# Altium PCB Blacklight.PcbDoc
Units mm, origin at the board's own origin, x right, y up, seen from the top; angles counter-clockwise.
Board outline 140 x 100 mm, 2 copper layers (Top Layer, Bottom Layer); 49 components, 26 nets, 111 pads, 0 vias.
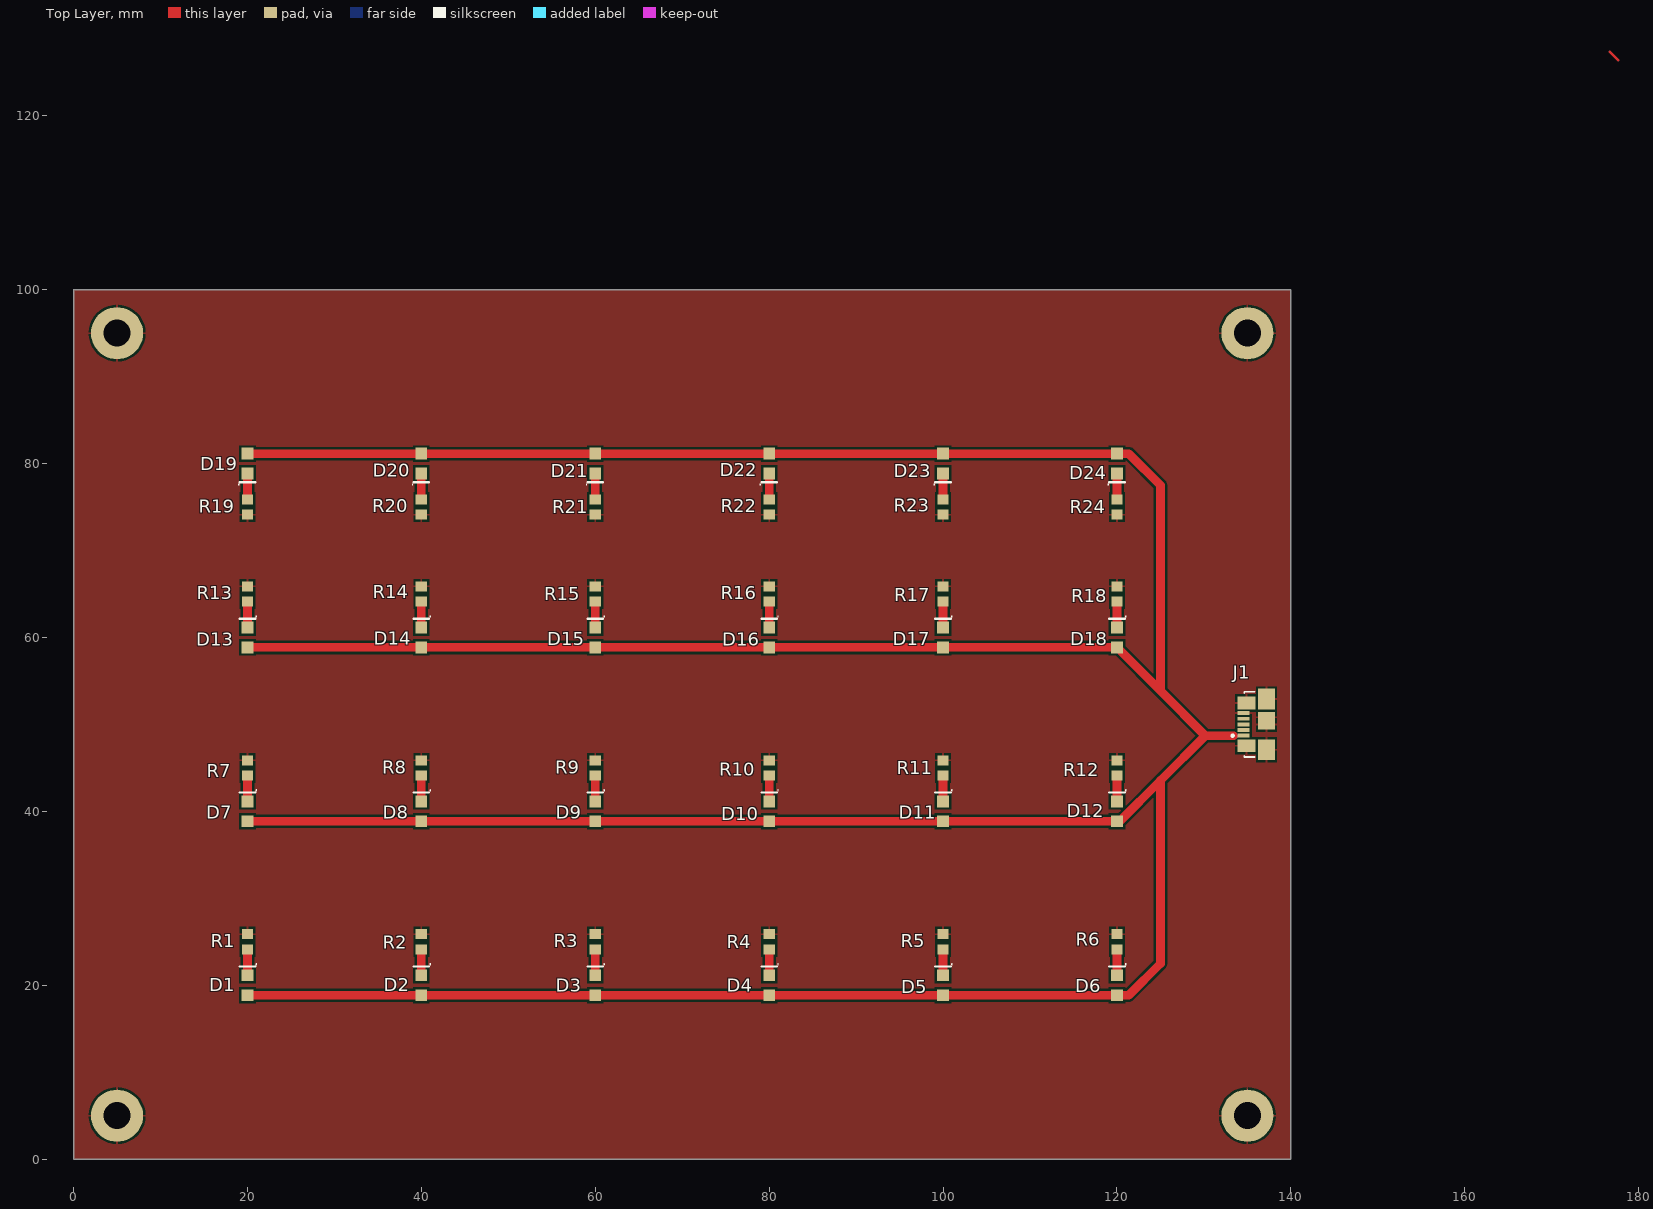
[diagram p0: Top Layer view]
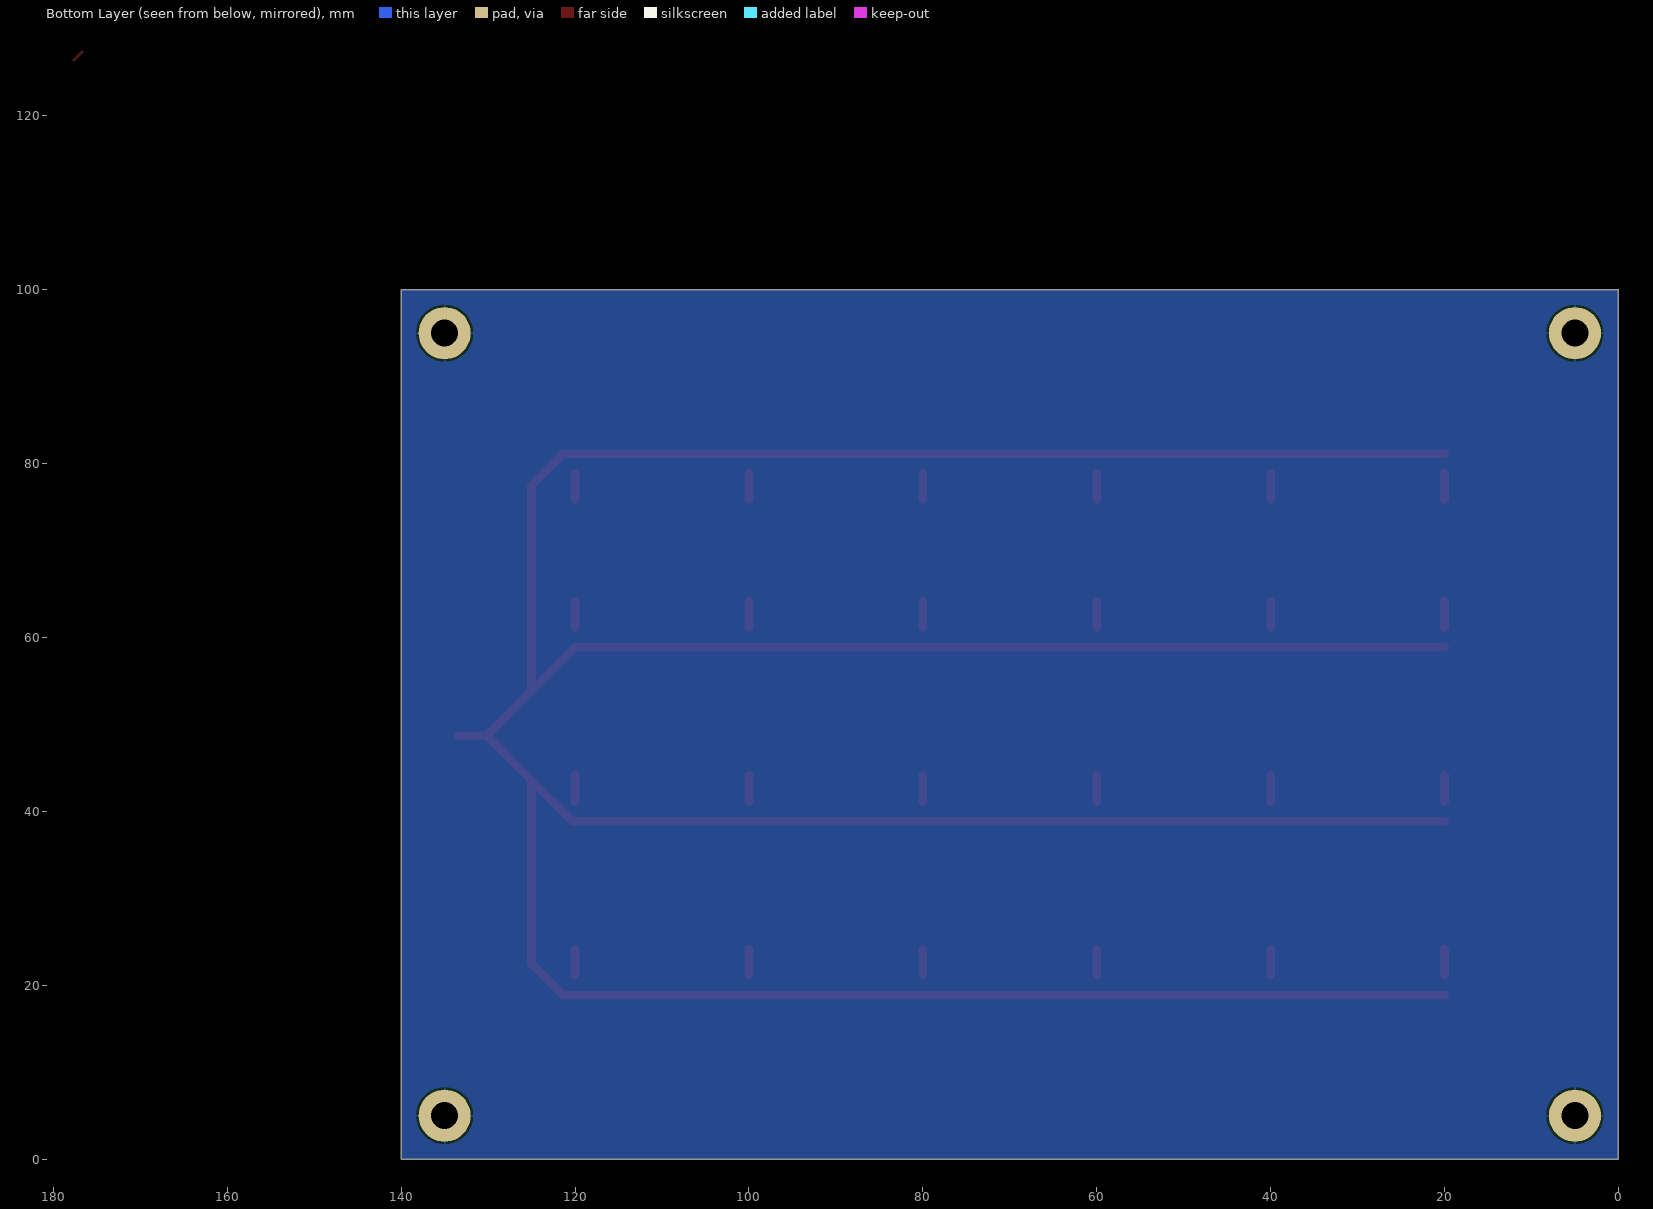
[diagram p1: Bottom Layer view, seen from below]
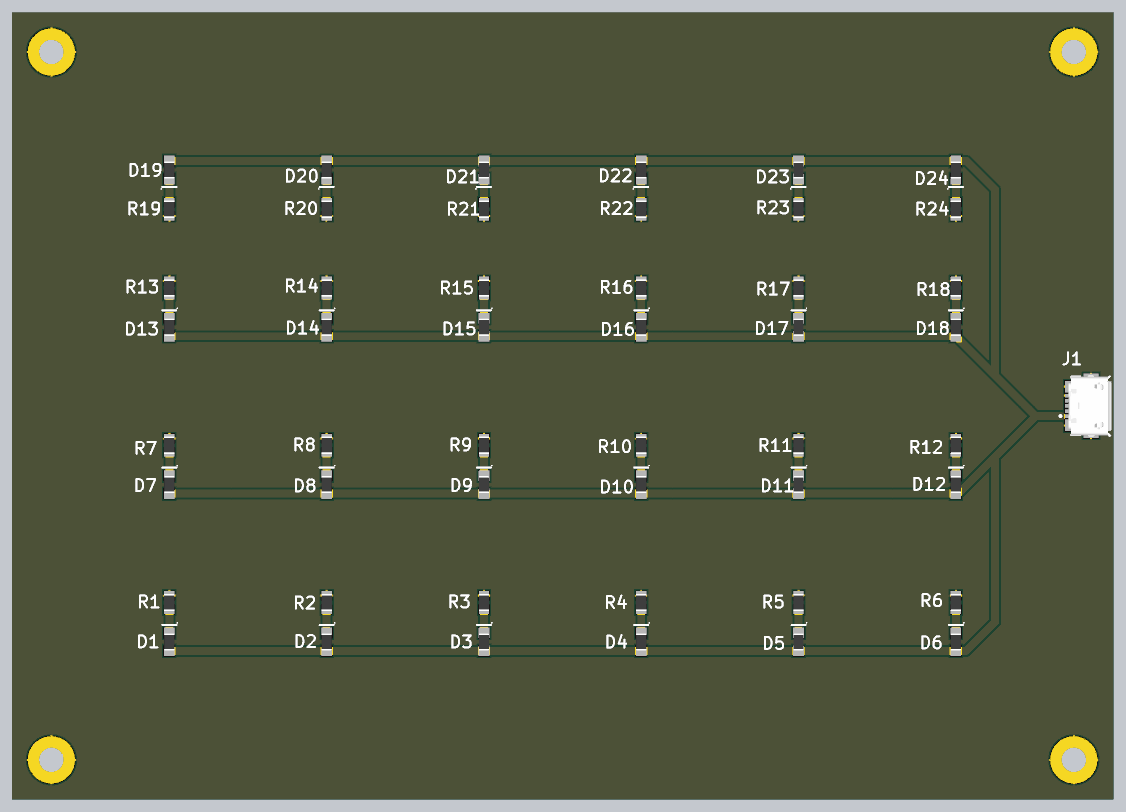
[diagram p2: 3D render of the assembled board from above, using the file's embedded part models]

## Layer stack, top to bottom
Top Solder: solder mask 0.0102, Solder Resist, Dk 3.5
Top Layer: signal copper 0.0356
Dielectric 1: dielectric 0.32, FR-4, Dk 4.8
Bottom Layer: signal copper 0.0356
Bottom Solder: solder mask 0.0102, Solder Resist, Dk 3.5

## Board outline
0,0 0,100 140,100 140,0

## Design rules (kind name [scope] priority, off if disabled: settings)
Clearance [All] p1: gap=0.254 ignorepadtopadclearanceinfootprint=FALSE except(0: Arc-Hole Track-Hole SMDPad-SMDPad SMDPad-THPad SMDPad-Via SMDPad-Hole THPad-Hole Via-Hole Fill-Hole Poly-Hole Region-Hole Text-Hole; 0.1: Arc-SMDPad Track-SMDPad)
PolygonConnect [All] p1: connectstyle=Relief reliefconductorwidth=0.254 reliefentries=4 polygonreliefangle="90 Angle" airgapwidth=0.254
RoomDefinition Backlight [InComponentClass('Backlight')] p1: confinementstyle=ConfineIn formatcopy=TRUE lockcomponents=FALSE outline 0,0 140,0 140,100 0,100
RoutingVias [All] p1: holewidth=0.711 width=1.27 viastyle="Through Hole" minholewidth=0.711 minwidth=1.27 maxholewidth=0.711 maxwidth=1.27
SolderMaskExpansion [All] p1: expansion=0.102
Width [All] p1: maxlimit=5 minlimit=0.1 preferedwidth=1
30 further rules are at their usual default settings.

## Components (designator, comment, footprint, x,y, rotation, side; value= is the part's Value field where it differs from the comment)
D1 "LED0" DIOC2012X06N 20,20 r90 top
D2 "LED0" DIOC2012X06N 40,20 r90 top
D3 "LED0" DIOC2012X06N 60,20 r90 top
D4 "LED0" DIOC2012X06N 80,20 r90 top
D5 "LED0" DIOC2012X06N 100,20 r90 top
D6 "LED0" DIOC2012X06N 120,20 r90 top
D7 "LED0" DIOC2012X06N 20,40 r90 top
D8 "LED0" DIOC2012X06N 40,40 r90 top
D9 "LED0" DIOC2012X06N 60,40 r90 top
D10 "LED0" DIOC2012X06N 80,40 r90 top
D11 "LED0" DIOC2012X06N 100,40 r90 top
D12 "LED0" DIOC2012X06N 120,40 r90 top
D13 "LED0" DIOC2012X06N 20,60 r90 top
D14 "LED0" DIOC2012X06N 40,60 r90 top
D15 "LED0" DIOC2012X06N 60,60 r90 top
D16 "LED0" DIOC2012X06N 80,60 r90 top
D17 "LED0" DIOC2012X06N 100,60 r90 top
D18 "LED0" DIOC2012X06N 120,60 r90 top
D19 "LED0" DIOC2012X06N 20,80 r270 top
D20 "LED0" DIOC2012X06N 40,80 r270 top
D21 "LED0" DIOC2012X06N 60,80 r270 top
D22 "LED0" DIOC2012X06N 80,80 r270 top
D23 "LED0" DIOC2012X06N 100,80 r270 top
D24 "LED0" DIOC2012X06N 120,80 r270 top
J1 "47346-0001" MOLX-47346-0001-5_V 137,50 r90 top
R1 "Res2" RESC2012X06N 20,25 r270 top value=100
R2 "Res2" RESC2012X06N 40,25 r270 top value=100
R3 "Res2" RESC2012X06N 60,25 r270 top value=100
R4 "Res2" RESC2012X06N 80,25 r270 top value=100
R5 "Res2" RESC2012X06N 100,25 r270 top value=100
R6 "Res2" RESC2012X06N 120,25 r270 top value=100
R7 "Res2" RESC2012X06N 20,45 r270 top value=100
R8 "Res2" RESC2012X06N 40,45 r270 top value=100
R9 "Res2" RESC2012X06N 60,45 r270 top value=100
R10 "Res2" RESC2012X06N 80,45 r270 top value=100
R11 "Res2" RESC2012X06N 100,45 r270 top value=100
R12 "Res2" RESC2012X06N 120,45 r270 top value=100
R13 "Res2" RESC2012X06N 20,65 r270 top value=100
R14 "Res2" RESC2012X06N 40,65 r270 top value=100
R15 "Res2" RESC2012X06N 60,65 r270 top value=100
R16 "Res2" RESC2012X06N 80,65 r270 top value=100
R17 "Res2" RESC2012X06N 100,65 r270 top value=100
R18 "Res2" RESC2012X06N 120,65 r270 top value=100
R19 "Res2" RESC2012X06N 20,75 r90 top value=100
R20 "Res2" RESC2012X06N 40,75 r90 top value=100
R21 "Res2" RESC2012X06N 60,75 r90 top value=100
R22 "Res2" RESC2012X06N 80,75 r90 top value=100
R23 "Res2" RESC2012X06N 100,75 r90 top value=100
R24 "Res2" RESC2012X06N 120,75 r90 top value=100

## Footprints (in the part's own frame and the unit in brackets; to place one, negate y for a bottom-side part, rotate by r counter-clockwise, add the part's x,y. Pads: shape width x height; smd on the part's side, far side on the other; paste and mask are expansions set on the pad)
DIOC2012X06N [mm] "Chip Diode, 2-Leads, Body 2.00x1.25mm, IPC Medium Density"
  rect 1.35x1.35 smd: 1(-1.143,0) 2(1.143,0)
  silkscreen extent 2.16,-1.07 2.46,0.89, body extent -1.1,-0.65 1.1,0.65, height 0.6
MOLX-47346-0001-5_V [mm] "SMD, 5-Leads, Body 7.5x5mm, Pitch 0.65mm"
  rect 0.45x1.38 smd: 1(-1.3,2.46) 2(-0.65,2.46) 3(0,2.46) 4(0.65,2.46) 5(1.3,2.46)
  rect 1.475x2.1 smd: 6(-2.462,2.1) 7(2.462,2.1)
  rect 2.375x1.9 smd: 8(-2.913,-0.2) 11(2.913,-0.2)
  rect 1.175x1.9 smd: 9(0,-0.2) 10(0.837,-0.2)
  silkscreen extent -3.75,1.16 3.75,3.82, body extent -3.99,-2.78 3.99,2.65, height 2.69
RESC2012X06N [mm] "Chip Resistor, 2-Leads, Body 2.00x1.23mm, IPC Medium Density"
  rect 1.15x1.3 smd: 1(-0.875,0) 2(0.875,0)
  body extent -1.1,-0.65 1.1,0.65, height 0.6

## Part data
D1 D2 D3 D4 D5 D6 D7 D8 D9 D10 D11 D12 D13 D14 D15 D16 D17 D18 D19 D20 D21 D22 D23 D24: "Typical INFRARED GaAs LED", LatestRevisionDate=08-Jul-2005, LatestRevisionNote="Mech Layer 1 removed.", PackageDescription="LED; 2 Leads", PackageReference=LED-0, Published=8-Jun-2000, Publisher="Altium Limited"
J1: library part CMP-2000-05246-1, "Micro-USB B Receptacle with Flange, -30 to 85 degC, 5-Pin SMD, RoHS, Tape and Reel", Color=Black, Manufacturer=Molex, Maximum Current Rating=1.8/ContactA, Maximum Voltage Rating=30VAC, Operating Temperature=-30to85C, Body Orientation=RightAngle, Contact Material=CopperAlloy, Contact Plating=GoldOverPalladiumNickelOverNickel, Datasheet URL=https://datasheet.ciiva.com/30075/304740473460001-io-nectors-30075527.pdf, Datasheet Version=Dec-13, Dimension=7.8x5.43x2.94mm, Gender=RCP, Housing Material=LiquidCrystalPolymer, Manufacturer URL=http://www.molex.com/, Mounting=SurfaceMount, Number of Contacts=5, Number of Ports=1, Number of Terminals=5, Packaging=EmbossedTapeandReel, Part No=47346-0001, Pitch=0.65mm, RoHS=Yes, Termination Method=Solder, Type=MicroUSBTypeB
R1 R2 R3 R4 R5 R6 R7 R8 R9 R10 R11 R12 R13 R14 R15 R16 R17 R18 R19 R20 R21 R22 R23 R24: "Resistor", LatestRevisionDate=17-Jul-2002, LatestRevisionNote="Re-released for DXP Platform.", PackageDescription="Axial Device, Thru-Hole; 2 Leads; 0.4 in Pin Spacing", PackageReference=AXIAL-0.4, Published=8-Jun-2000, Publisher="Altium Limited"

## Free pads (board coordinates)
  round 6 hole 3.1: 1(5,5) 1(5,95) 1(135,5) 1(135,95)

## Nets (pads, with @x,y where several pads share a name; then routed paths per layer and width w, separated by ;. In a path a pad name is that pad's centre, name@x,y a point inside that pad or via, vN(x,y) a via of type N, cw(c..) or ccw(c..) an arc to the next point about the centre after c; other vN are vias at no path point)
GND: J1.5 J1.6 J1.7 J1.8 J1.9 J1.10 J1.11 pad.1 R1.1 R2.1 R3.1 R4.1 R5.1 R6.1 R7.1 R8.1 R9.1 R10.1 R11.1 R12.1 R13.1 R14.1 R15.1 R16.1 R17.1 R18.1 R19.1 R20.1 R21.1 R22.1 R23.1 R24.1
NetD1_2: D1.2 R1.2 | length 3
  Top Layer w1: D1.2 R1.2
NetD2_2: D2.2 R2.2 | length 3
  Top Layer w1: D2.2 R2.2
NetD3_2: D3.2 R3.2 | length 3
  Top Layer w1: D3.2 R3.2
NetD4_2: D4.2 R4.2 | length 3
  Top Layer w1: D4.2 R4.2
NetD5_2: D5.2 R5.2 | length 3
  Top Layer w1: D5.2 R5.2
NetD6_2: D6.2 R6.2 | length 3
  Top Layer w1: D6.2 R6.2
NetD7_2: D7.2 R7.2 | length 3
  Top Layer w1: D7.2 R7.2
NetD8_2: D8.2 R8.2 | length 3
  Top Layer w1: D8.2 R8.2
NetD9_2: D9.2 R9.2 | length 3
  Top Layer w1: D9.2 R9.2
NetD10_2: D10.2 R10.2 | length 3
  Top Layer w1: D10.2 R10.2
NetD11_2: D11.2 R11.2 | length 3
  Top Layer w1: D11.2 R11.2
NetD12_2: D12.2 R12.2 | length 3
  Top Layer w1: D12.2 R12.2
NetD13_2: D13.2 R13.2 | length 3
  Top Layer w1: D13.2 R13.2
NetD14_2: D14.2 R14.2 | length 3
  Top Layer w1: D14.2 R14.2
NetD15_2: D15.2 R15.2 | length 3
  Top Layer w1: D15.2 R15.2
NetD16_2: D16.2 R16.2 | length 3
  Top Layer w1: D16.2 R16.2
NetD17_2: D17.2 R17.2 | length 3
  Top Layer w1: D17.2 R17.2
NetD18_2: D18.2 R18.2 | length 3
  Top Layer w1: D18.2 R18.2
NetD19_2: D19.2 R19.2 | length 3
  Top Layer w1: R19.2 D19.2
NetD20_2: D20.2 R20.2 | length 3
  Top Layer w1: R20.2 D20.2
NetD21_2: D21.2 R21.2 | length 3
  Top Layer w1: R21.2 D21.2
NetD22_2: D22.2 R22.2 | length 3
  Top Layer w1: R22.2 D22.2
NetD23_2: D23.2 R23.2 | length 3
  Top Layer w1: R23.2 D23.2
NetD24_2: D24.2 R24.2 | length 3
  Top Layer w1: R24.2 D24.2
VCC: D1.1 D2.1 D3.1 D4.1 D5.1 D6.1 D7.1 D8.1 D9.1 D10.1 D11.1 D12.1 D13.1 D14.1 D15.1 D16.1 D17.1 D18.1 D19.1 D20.1 D21.1 D22.1 D23.1 D24.1 J1.1 | length 489.6
  Top Layer w1: D1.1 D2.1 D3.1 D4.1 D5.1 D6.1 121.357,18.857 125,22.5 125,43.543 ; D7.1 D8.1 D9.1 D10.1 D11.1 D12.1 120.314,38.857 125,43.543 ; D13.1 D14.1 D15.1 D16.1 D17.1 D18.1 125,53.857 ; D19.1 D20.1 D21.1 D22.1 D23.1 D24.1 121.357,81.143 125,77.5 125,53.857 ; 133.426,48.7 130.157,48.7 ; 125,43.543 130.157,48.7 ; 125,53.857 130.157,48.7
pads on no net: J1.2 J1.3 J1.4
copper on no net: | length 1.4
  Top Layer w0.254: 176.657,127.381 177.673,126.365

## Polygon pours and split planes (outlines as drawn)
GND on Top Layer (solid, pour order 0): 0,100 140,100 140,0 0,0
GND on Bottom Layer (solid, pour order 2): 0,100 140,100 140,0 0,0

## Silkscreen, mask and mechanical layers (free items; w line width, h text height)
Mechanical 1:
  the board outline again, w0.254

## Text inside footprints (layer, text, board x,y; h text height)
J1: Mechanical 6 "PCB EDGE" at 138.757,42.8 h0.3 r90